# EAGLE board board (EAGLE 8.1.0)
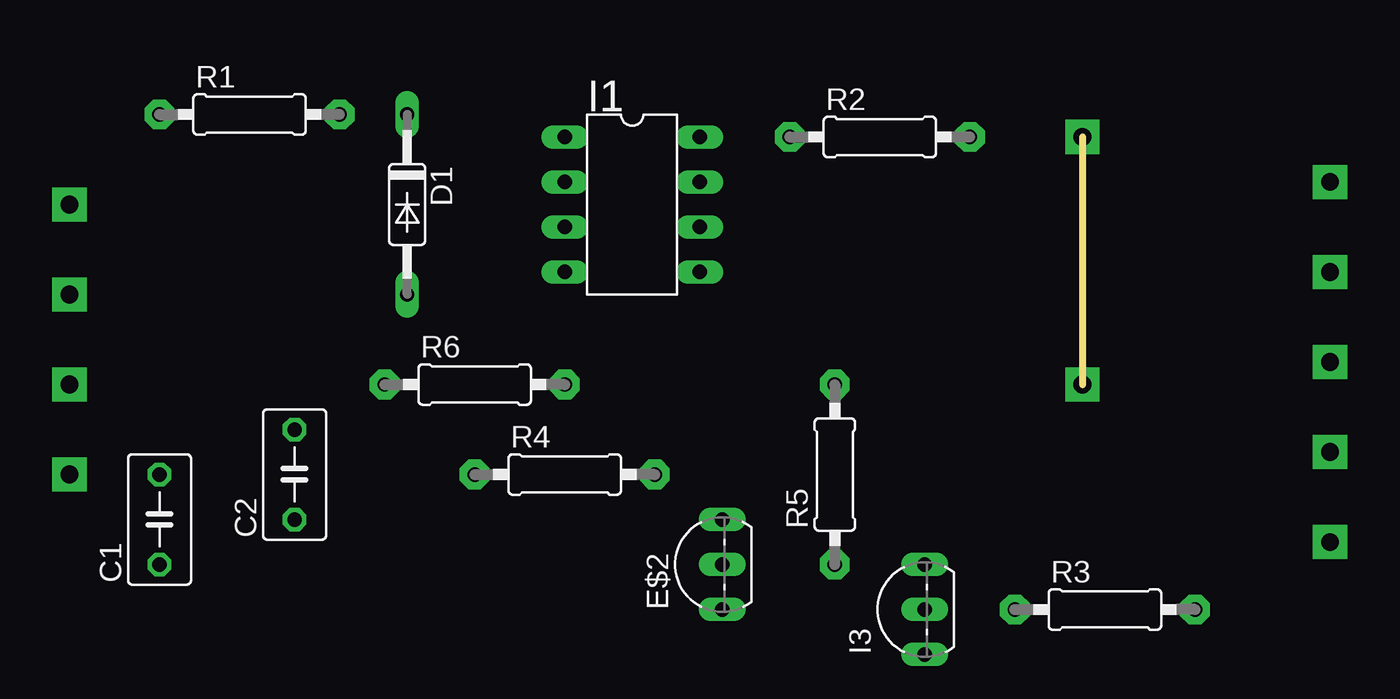
[diagram p0: board, top side]
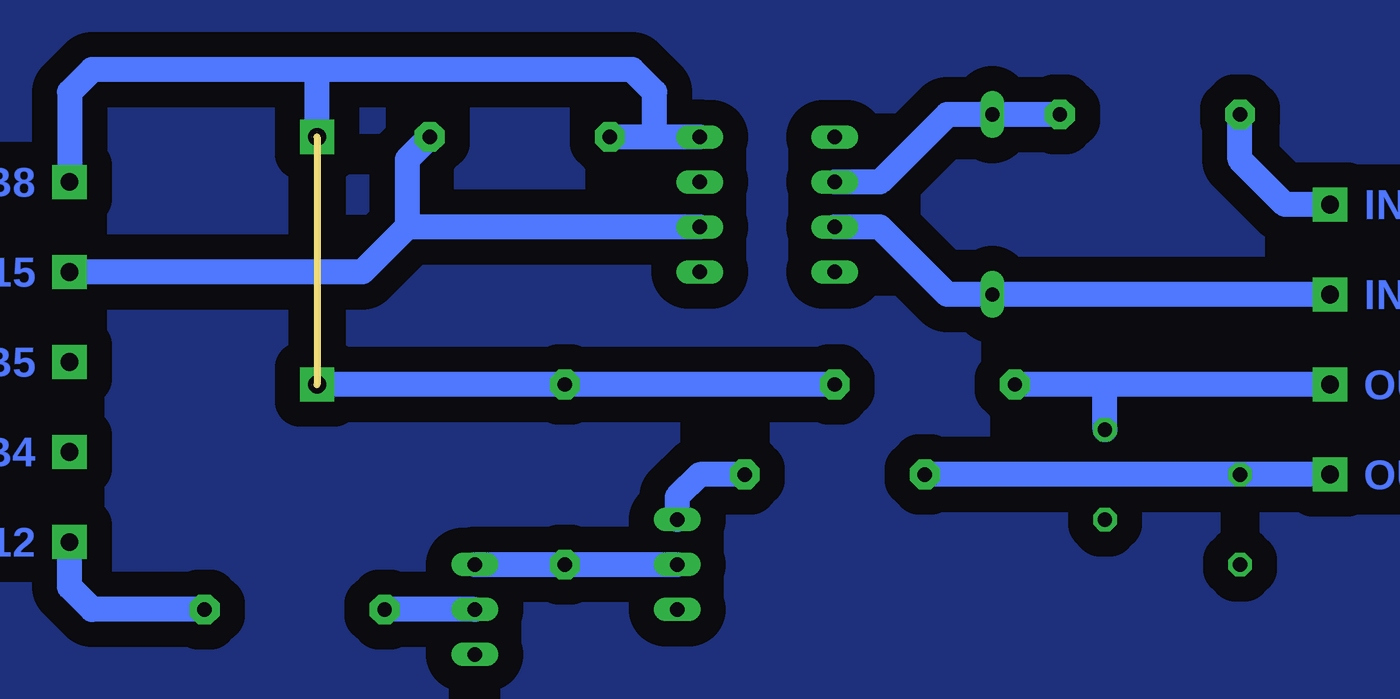
[diagram p1: board, bottom side, seen from below]

Size 0 x 13.97 mm. Coordinates in mm from the lower left corner, seen from the top.
Outline: 0,13.97 0,0
Copper layers (1*16): Top 0.035mm / dielectric 1.5mm / Bottom 0.035mm
Design rules "default": minimum track width 10mil, minimum drill 24mil, track to track 8mil, track to pad 8mil, pad to pad 8mil, via to via 8mil, smd to smd 8mil, copper to edge 40mil, drill to drill 8mil, minimum pad ring 10mil, minimum via ring 8mil, stop-mask expansion 4mil, vias tented up to drill 0mil, thermal gap 10mil

## Footprints (pad centres in the part's own frame; a part is rotated, then mirrored left to right if it is on the bottom)
C050-035X075 = drill 0.813 octagon: 1 -2.54,0; 2 2.54,0
DO35-10 = drill 0.813 long: A 5.08,0; C -5.08,0
TO92-EBC-OVAL = drill 0.813 long: B 0,-1.27; C 2.54,-1.27; E -2.54,-1.27
DIL8 = drill 0.813 long: 1 -3.81,-3.81; 2 -1.27,-3.81; 3 1.27,-3.81; 4 3.81,-3.81; 5 3.81,3.81; 6 1.27,3.81; 7 -1.27,3.81; 8 -3.81,3.81
0207/10 = drill 0.813 pad 1.676 octagon: 1 -5.08,0; 2 5.08,0

## Placement (x,y rotation side)
C1  .01  [C050-035X075]  -52.07,-7.62 90 top  (outside the outline)
C2  .01  [C050-035X075]  -44.45,-5.08 90 top  (outside the outline)
D1  1N4148  [DO35-10]  -38.1,10.16 270 top  (outside the outline)
E$2  [TO92-EBC-OVAL]  -21.59,-10.16 90 top  (outside the outline)
I1  6N136  [DIL8]  -25.4,10.16 270 top  (outside the outline)
I3  [TO92-EBC-OVAL]  -10.16,-12.7 90 top  (outside the outline)
R1  270  [0207/10]  -46.99,15.24 0 top  (outside the outline)
R2  5.6K  [0207/10]  -11.43,13.97 0 top  (outside the outline)
R3  10k  [0207/10]  1.27,-12.7 0 top  (outside the outline)
R4  270  [0207/10]  -29.21,-5.08 0 top  (outside the outline)
R5  2.2K  [0207/10]  -13.97,-5.08 90 top  (outside the outline)
R6  220  [0207/10]  -34.29,0 0 top  (outside the outline)

## Library data of the parts
C1 C2 D1 E$2 I3 R1-R6 = adafruit
I1 = microchip

## Nets
I2: E$2.B I3.C
S$2: R1.1
S$3: D1.A I1.3
S$4: D1.C I1.2 R1.2
S$5: C2.2 R6.1
S$6: R4.1
S$7: I1.6 R2.2
S$8: I3.B R3.1
S$12: R3.2
S$14: E$2.C R4.2
S$15: R5.2 R6.2
S$16: I1.8 R2.1

## Tracks (layer width: path | path; a pad name or v marks a point on that pad's centre or on a via)
I2
  Bottom 1.422: I3.C E$2.B
S$2  (via drill 1 pad 1.93)
  Bottom 1.422: v-57.15,10.16 -54.61,10.16 -52.07,12.7 R1.1
S$3  (via drill 1 pad 1.93)
  Bottom 1.422: v-57.15,5.08 D1.A -35.56,5.08 -31.75,8.89 I1.3
S$4
  Bottom 1.422: R1.2 D1.C -35.56,15.24 -31.75,11.43 I1.2
S$5  (via drill 1 pad 1.93)
  Bottom 1.422: v-57.15,0 -44.45,0 | -44.45,0 R6.1 | C2.2 -44.45,0
S$6  (via drill 1 pad 1.93)
  Bottom 1.422: v-57.15,-5.08 R4.1
S$7  (via drill 1 pad 1.93)
  Bottom 1.422: I1.6 -5.08,8.89 | -5.08,8.89 -2.54,6.35 v13.97,6.35 | R2.2 -5.08,12.7 -5.08,8.89
S$8
  Bottom 1.422: I3.B R3.1
S$9  (via drill 1 pad 1.93)
  other vias: 13.97,1.27
S$10  (via drill 1 pad 1.93)
  other vias: 13.97,-3.81
S$12  (via drill 1 pad 1.93)
  Bottom 1.422: R3.2 12.7,-12.7 13.97,-11.43 v13.97,-8.89
S$14
  Bottom 1.422: R4.2 -21.59,-5.08 -20.32,-6.35 E$2.C
S$15  (via drill 1 pad 1.93)
  Bottom 1.422: R6.2 R5.2 v0,0
S$16  (via drill 1 pad 1.93)
  Bottom 1.422: I1.8 -19.05,13.97 | -19.05,13.97 R2.1 | -19.05,13.97 -19.05,16.51 -17.78,17.78 0,17.78 | 0,17.78 12.7,17.78 13.97,16.51 v13.97,11.43 | v0,13.97 0,17.78
S$17
  pour Bottom (isolate 1.422): -69.85,26.67 -69.85,-21.59 27.94,-21.59 27.94,26.67

## Text on the board
Bottom: SB8 | IN4 | SB15 | IN5 | SB5 | OUT4 | SB4 | OUT5 | SB12